# Allegro board PCB.brd
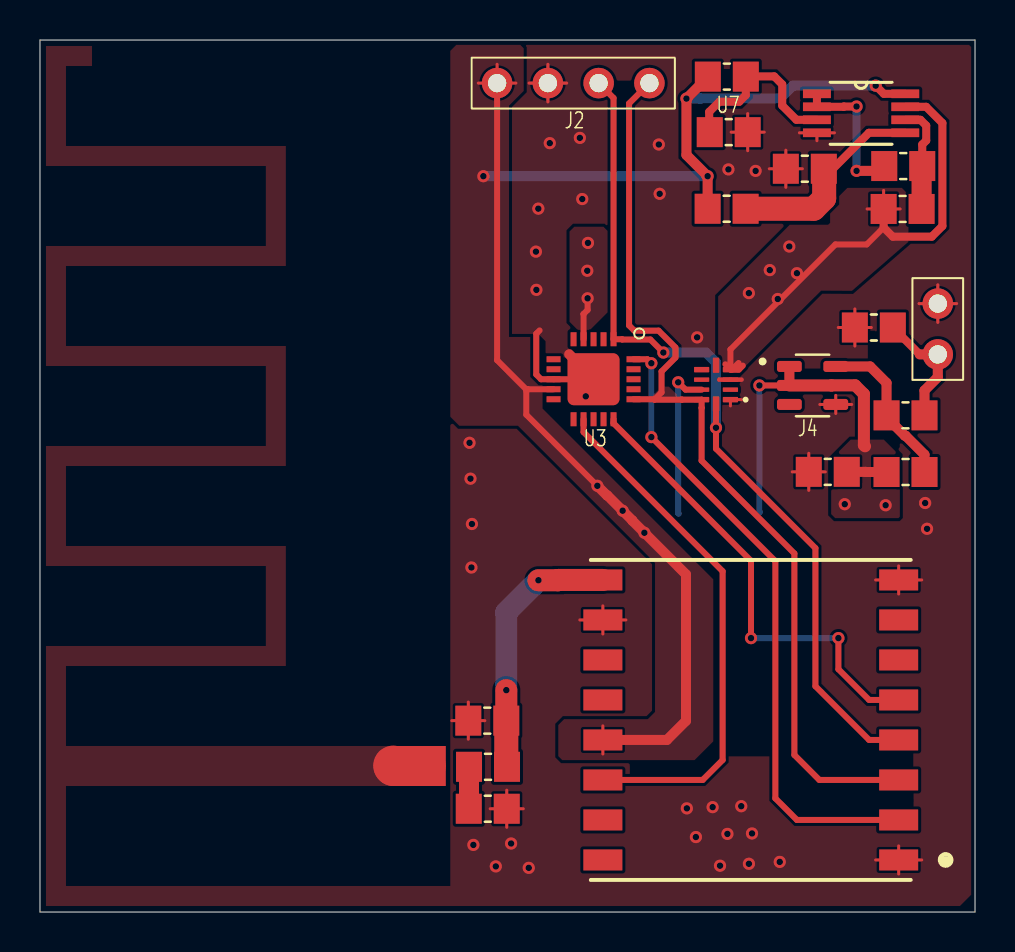
[diagram p0: board, top side]
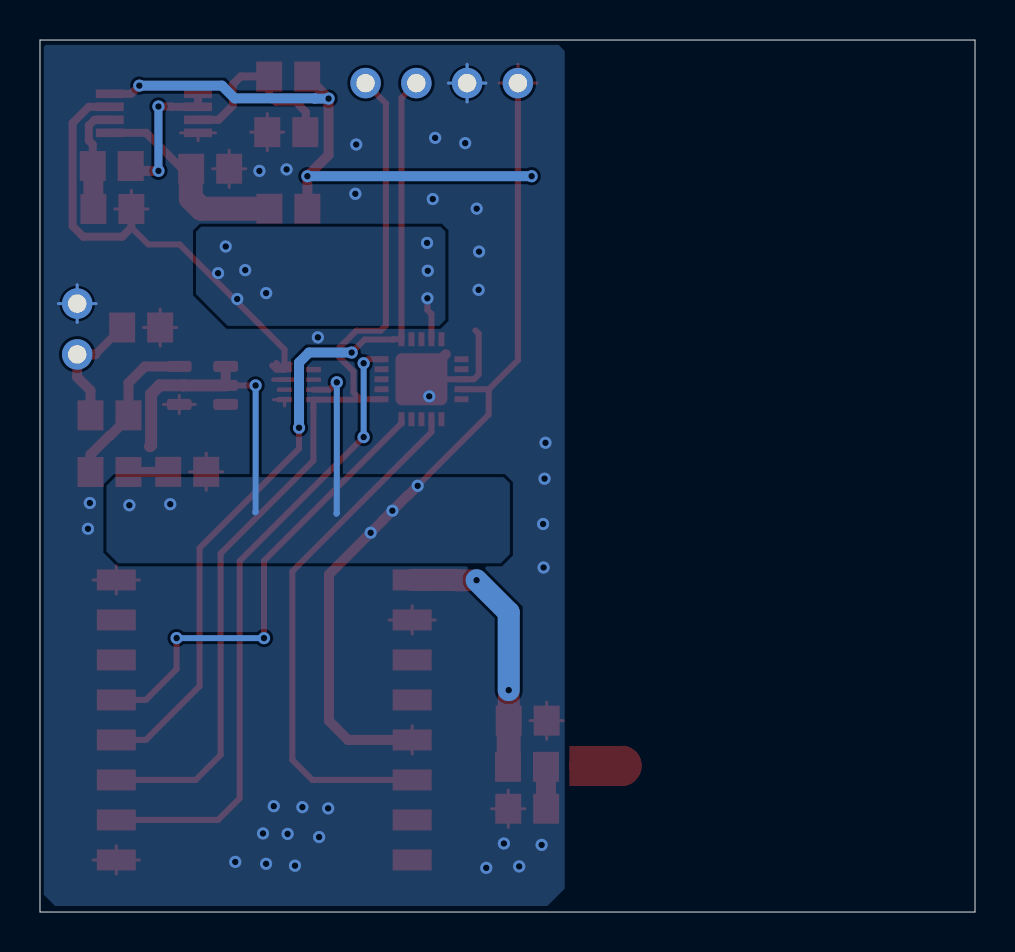
[diagram p1: board, bottom side, seen from below]

Outline 46.78 x 43.6 mm; copper layers: TOP, BOTTOM. Coordinates in mm from the lower left corner of the outline.
Outline path: 0,43.6 0,0 46.78,0 46.78,43.6 0,43.6

## Design rules (mm)
constraint set DEFAULT: min track width 0.15

## Placement (name value [footprint] x y rotation side)
C1  34.8p  [CAPC2012X135N]  22.38 9.57 0 top
C2  52.2p  [CAPC2012X135N]  22.4 5.16 180 top
C3  10u  [CAPC2012X135N]  41.72 29.23 0 top
C4  68u  [CAPC2012X135N]  39.41 22.01 0 top
D1  1N5511  [CAPC2012X135N]  43.3 22 180 top
J1  RFM95  [XCVR_RFM95W-868S2]  35.56 9.6 180 top
J2  SI7021  [JUMPER4]  22.87 41.45 0 top
J3  ADS1014  [QFN50P200X150X40-10N]  33.82 26.37 180 top
J4  NCP1402  [SOT95P275X110-5N]  38.65 26.33 0 top
J5  LTC2064  [MSOP-8_MS]  41.08 39.94 0 top
J6  CON2  [JUMPER2]  44.92 27.88 90 top
J7  ant  [PORT_ANTENA]  19.3 7.3 0 top
L2  10uH  [CAPC2012X135N]  43.3 24.83 0 top
L3  1.40n  [CAPC2012X135N]  22.41 7.26 180 top
R6  10k  [CAPC2012X135N]  34.46 38.99 180 top
R7  195.23k  [CAPC2012X135N]  34.35 35.16 180 top
R8  200k  [CAPC2012X135N]  38.27 37.16 0 top
R9  10k  [CAPC2012X135N]  43.19 37.3 180 top
R10  120k  [CAPC2012X135N]  43.16 35.15 0 top
U3  ATTINY84  [QFN20G-05-4X4MM]  27.7 26.64 270 top
U7  TFPT1206L1002  [CAPC2012X135N]  34.36 41.77 0 top

## Library data of the parts
C1-C4 = C
D1 = 1N4376
J1 = CON16
J2 = CON4
J3 = CON10
J4 = CON5
J5 = CON8
J6 = CON2
J7 = CON1
L2 L3 = L
R6-R10 = R
U3 = MC-8B-ATTINY24-SQ21_0
U7 = TFPT1206L1002

## Footprints (pads in the part's own frame, mm; a bottom-side part is the same pattern mirrored in y, then rotated)
CAPC2012X135N
  rect 1.3x1.5 smd: 1(-0.95,0) 2(0.95,0)
JUMPER2
  round 1.524 hole 0.914: 1(0,0) 2(2.54,0)
JUMPER4
  round 1.524 hole 0.914: 1(0,0) 2(2.54,0) 3(5.08,0) 4(7.62,0)
MSOP-8_MS
  rect 1.397x0.432 smd: 1(-2.21,0.975) 2(-2.21,0.325) 3(-2.21,-0.325) 4(-2.21,-0.975) 5(2.21,-0.975) 6(2.21,-0.325) 7(2.21,0.325) 8(2.21,0.975)
PORT_ANTENA
  rect 2x2 smd: 1(0,0)
QFN20G-05-4X4MM
  rect 0.7x0.3 smd: 1(-2,1) 2(-2,0.5) 3(-2,0) 4(-2,-0.5) 5(-2,-1) 11(2,-1) 12(2,-0.5) 13(2,0) 14(2,0.5) 15(2,1)
  rect 0.3x0.7 smd: 6(-1,-2) 7(-0.5,-2) 8(0,-2) 9(0.5,-2) 10(1,-2) 16(1,2) 17(0.5,2) 18(0,2) 19(-0.5,2) 20(-1,2)
  custom 2.6x2.6 smd: PAD(0,0)
QFN50P200X150X40-10N
  custom 0.76x0.27 smd: 1(-0.72,0.75) 4(-0.72,-0.75) 6(0.72,-0.75) 9(0.72,0.75)
  custom 0.76x0.22 smd: 2(-0.72,0.25) 3(-0.72,-0.25) 7(0.72,-0.25) 8(0.72,0.25)
  custom 0.32x0.76 smd: 5(0,-0.97) 10(0,0.97)
SOT95P275X110-5N
  custom 1.24x0.55 smd: 1(-1.16,0.95) 2(-1.16,0) 3(-1.16,-0.95) 4(1.16,-0.95) 5(1.16,0.95)
XCVR_RFM95W-868S2
  rect 1.95x1.05 smd: 1(-7.4,7) 2(-7.4,5) 3(-7.4,3) 4(-7.4,1) 5(-7.4,-1) 6(-7.4,-3) 7(-7.4,-5) 8(-7.4,-7) 9(7.4,-7) 10(7.4,-5) 11(7.4,-3) 12(7.4,-1) 13(7.4,1) 14(7.4,3) 15(7.4,5) 16(7.4,7)

## Nets
3V3: C4.2 D1.2(K) J1.13 J2.1 J3.8 J4.1 J4.2 J5.8 R7.2 U3.9(VCC) U7.1(RP)
VCC: C3.2 J6.1 L2.2
0: C1.1 C2.1 C3.1 C4.1 J1.1 J1.8 J1.10 J2.2 J3.1 J3.3 J4.4 J5.4 J6.2 J7.1 R6.1 R8.1 U3.8 U3.PAD
ANT_LORA: C1.2 J1.9 L3.1
DIO0: J1.14 U3.12
MISO: J1.2 U3.20
MOSI: J1.3 J2.4 J3.9 U3.16
NSS: J1.5 U3.15
SCK: J1.4 J2.3 J3.10 U3.1
VOUT_AMP: J3.4 J5.7 R10.1 U3.4
N16090: J5.1 J5.2 R9.2
N16108: J5.5 R7.1 R8.2
N16144: J5.3 R6.2 U7.2
N16168: J5.6 R9.1 R10.2
N16662: D1.1 J4.5 L2.1
N16822: C2.2 L3.2

Pads without a net: J1 6 7 11 12 15 16; J3 2 5 6 7; J4 3; U3 2 3 5 6 7 10 11 13 14 17 18 19

## Via types
v1: diameter 0.61, hole 0.33, TOP to BOTTOM, 60 vias

## Routing (per net, layer and track width the routed paths; a pad name or vN(x,y) marks a point on that pad's centre or on a via; arc(x,y) is an arc through that point)
3V3: length 101.7
  TOP w0.15: 28.16,7.9 J1.13 28.16,9.31 ; J2.1 22.87,42.38 ; J2.1 23.81,41.45 ; J2.1 21.93,41.45
  TOP w0.3: 24.4,26.12 24.34,26.12 22.87,27.59 J2.1 ; 24.4,26.12 24.33,26.05 24.33,24.86 v1(27.89,21.31) ; 24.4,26.12 24.41,26.14 U3.9 ; J4.2 v1(35.99,26.33) ; J3.8 32.3,26.12 v1(31.93,26.48)
  TOP w0.4: J5.8 42.22,40.91 v1(41.81,41.32)
  TOP w0.5: R7.2 v1(33.4,36.79) 32.34,37.85 v1(32.34,40.67) 33.41,41.74 U7.1 ; C4.2 41.31,22.01 41.32,22 D1.2 ; v1(27.89,21.31) 28.37,20.83 28.39,20.83 v1(29.15,20.07) 29.63,19.58 29.63,19.57 v1(30.24,18.96) 32.32,16.88 32.32,9.56 31.37,8.6 J1.13 27.86,8.6 ; J4.1 J4.2
  TOP w0.6: 41.28,23.29 41.22,23.34 41.22,25.9 40.78,26.33 39.6,26.33 39.6,26.33 J4.2
  BOTTOM w0.3: v1(31.93,26.48) 31.93,19.94 31.96,19.91 ; 42.25,20.41 42.25,20.39 v1(42.31,20.34) ; 36.01,19.98 35.99,20 v1(35.99,26.33)
  BOTTOM w0.5: v1(32.34,40.67) 33.02,40.67 33.03,40.68 37.04,40.68 37.67,41.32 v1(41.81,41.32) ; v1(33.4,36.79) v1(22.18,36.79)
  vias: v1(40.26,20.39)
VCC: length 6.1
  TOP w0.4: C3.2 44.01,27.88
  TOP w0.5: L2.2 44.25,26.08 44.92,26.74 J6.1 44.01,27.88
0: length 62.5
  TOP w0.15: J1.1 44.11,2.6 ; J1.1 42.96,1.9 ; J1.1 41.81,2.6 ; J1.1 42.96,3.31 ; J6.2 44.92,31.36 ; J6.2 45.86,30.42 ; J6.2 43.98,30.42 ; J6.2 44.92,29.48 ; R6.1 35.41,39.92 ; R6.1 36.24,38.99 ; R6.1 34.58,38.99 ; R6.1 35.41,38.06 ; J1.10 29.31,14.6 ; J1.10 28.16,15.31 ; J1.10 27.01,14.6 ; J1.10 28.16,13.9 ; J1.8 42.96,17.31 ; J1.8 41.81,16.6 ; J1.8 44.11,16.6 ; J1.8 42.96,15.9 ; 37.63,22.01 C4.1 ; C4.1 39.29,22.01 ; C4.1 38.46,22.94 ; C4.1 38.46,21.08 ; R8.1 38.14,37.16 ; R8.1 37.31,38.09 ; R8.1 36.49,37.16 ; R8.1 37.31,36.23 ; 37.99,38.96 J5.4 ; J5.4 39.75,38.96 ; J5.4 38.87,38.57 ; 35.1,25.62 J3.1 34.54,25.3 ; 39.81,24.92 J4.4 ; J4.4 39.81,25.83 ; J4.4 40.61,25.38 ; J4.4 39.01,25.38 ; C3.1 40.77,30.15 ; C3.1 39.94,29.23 ; C3.1 41.6,29.23 ; C3.1 40.77,28.3 ; J2.2 25.41,42.38 ; J2.2 24.47,41.45 ; J2.2 25.41,40.51 ; J2.2 26.35,41.45 ; C2.1 23.35,6.09 ; C2.1 23.35,4.23 ; C2.1 22.52,5.16 ; C2.1 24.18,5.16 ; C1.1 22.26,9.57 ; C1.1 21.43,8.64 ; C1.1 21.43,10.5 ; C1.1 20.6,9.57
  TOP w0.225: 33.98,26.62 J3.3 35.1,26.62
  TOP w0.3: U3.PAD U3.8 25.07,26.64 24.83,26.88 24.83,28.91 25,29.08
  TOP w0.5: 26.48,27.89 27.7,26.67 U3.PAD
  TOP w2: 17.67,7.32 17.69,7.3 J7.1
  BOTTOM w0.15: J6.2 44.92,31.36 ; J6.2 44.92,29.48 ; J6.2 45.86,30.42 ; J6.2 43.98,30.42 ; 25.41,40.51 J2.2 ; J2.2 25.41,42.38 ; J2.2 24.47,41.45 ; J2.2 26.35,41.45
  vias: v1(21.49,23.46) v1(21.54,21.67) v1(21.61,19.4) v1(21.59,17.23) v1(21.68,3.35) v1(22.8,2.28) v1(23.57,3.42) v1(24.45,2.21) v1(24.81,33.02) v1(24.84,31.11) v1(24.93,35.17) v1(25.5,38.44) v1(27.01,38.7) v1(27.13,35.65) v1(27.3,25.78) v1(30.96,38.38) v1(31,35.91) v1(32.36,5.18) v1(32.81,3.75) v1(32.88,28.73) v1(33.65,5.24) v1(34.02,2.31) v1(34.44,37.13) v1(34.39,3.9) v1(35.08,5.29) v1(35.47,2.41) v1(35.62,3.93) v1(35.8,37.05) v1(37.01,2.5) v1(44.28,20.45) v1(44.38,19.16)
ANT_LORA: length 13.2
  TOP w1.1: J1.9 25.93,16.6 25.92,16.59 v1(24.94,16.59) ; v1(23.33,11.09) C1.2
  TOP w1.2: L3.1 23.33,7.29 C1.2
  BOTTOM w1.1: v1(23.33,11.09) 23.33,14.98 v1(24.94,16.59)
DIO0: length 26.6
  TOP w0.3: 27.86,6.6 J1.14 33.15,6.6 34.15,7.6 34.15,17.04 27.2,24 U3.12
MISO: length 32.2
  TOP w0.3: 43.26,4.6 J1.2 37.87,4.6 36.79,5.68 36.79,17.54 v1(30.59,23.75) ; U3.20 30.39,27.64 v1(30.59,27.44)
  BOTTOM w0.3: v1(30.59,27.44) v1(30.59,23.75)
MOSI: length 47.5
  TOP w0.3: U3.16 30.73,25.64 30.74,25.62 ; J2.4 29.47,40.43 29.47,29.33 29.73,29.07 30.95,29.07 31.79,28.22 31.79,27.72 31.1,27.03 31.1,25.98 30.74,25.62 ; 32.12,25.62 J3.9 33.1,25.21 33.1,25.2 33.1,22.57 37.74,17.93 37.74,7.85 38.99,6.6 J1.3 43.26,6.6 ; 32.12,25.62 32.11,25.62 ; 32.12,25.62 30.75,25.62 30.74,25.62
NSS: length 23.7
  TOP w0.3: U3.15 28.7,24.44 35.57,17.56 v1(35.57,13.7) ; 43.26,10.6 J1.5 41.48,10.6 39.95,12.14 v1(39.95,13.7)
  BOTTOM w0.3: v1(39.95,13.7) v1(35.57,13.7)
SCK: length 43.7
  TOP w0.3: J2.3 28.7,40.7 U3.1 29.12,28.64 29.13,28.62 30.54,28.62 v1(31.19,27.97) ; J3.10 33.82,24.74 33.82,24.74 v1(33.82,24.21) 33.82,23.17 38.79,18.19 38.79,11.29 41.48,8.6 J1.4 43.26,8.6
  BOTTOM w0.5: v1(31.19,27.97) 33.32,27.97 33.82,27.47 v1(33.82,24.21)
VOUT_AMP: length 29.1
  TOP w0.15: R10.1 43.04,35.15 ; R10.1 41.38,35.15 ; R10.1 42.21,36.08
  TOP w0.3: 34.62,27.12 J3.4 34.54,27.14 ; 34.62,27.12 34.96,27.12 35.16,27.32 ; 34.62,27.12 34.95,27.45 ; v1(27.4,30.68) 27.4,30.1 27.19,29.9 27.2,29.9 U3.4 ; 34.54,27.14 34.29,27.39 ; 34.54,27.14 34.54,28.13 39.79,33.38 41.36,33.38 42.21,34.23
  TOP w0.4: J5.7 44.33,40.26 45.15,39.45 45.15,34.3 44.61,33.77 42.67,33.77 42.21,34.23 R10.1
  vias: v1(27.41,33.45) v1(27.38,32.06) v1(35.46,30.95) v1(36.51,32.09) v1(36.91,30.65) v1(37.49,33.27) v1(37.87,31.94)
N16090: length 7.3
  TOP w0.4: v1(40.85,40.27) 40.22,40.27 40.21,40.26 J5.2 J5.1
  TOP w0.5: v1(40.85,37.06) 42,37.06 R9.2
  BOTTOM w0.4: v1(40.85,37.06) v1(40.85,40.27)
N16108: length 10.5
  TOP w0.4: R8.2 39.67,37.16 41.47,38.96 J5.5
  TOP w1.2: R8.2 39.23,37.15 39.23,35.69 38.71,35.16 R7.1
N16144: length 9.2
  TOP w0.4: J5.3 37.84,39.61 37.13,40.32 37.13,41.38 36.73,41.78 35.32,41.78 U7.2 35.31,40.84 34.98,40.51 33.99,40.51 33.48,40.01 33.48,39.02 R6.2
N16168: length 5.4
  TOP w0.4: J5.6 44.05,39.61 44.34,39.32 44.34,38.57 44.14,38.37 R9.1
  TOP w1: R10.2 44.11,37.27 R9.1
N16662: length 8.1
  TOP w0.5: D1.1 44.25,22.87 43.3,23.82 43.27,23.82 42.35,24.73 L2.1 42.35,26.45 41.53,27.28 J4.5
N16822: length 2.1
  TOP w1: C2.2 21.46,5.17 L3.2

## Copper pours and planes (outline as drawn; the poured copper is in the pictures)
3V3 on TOP: 39.58,21.44 39.58,19.89 39.78,19.69 42.95,19.69 43.02,19.76 43.02,21.22 42.78,21.45 39.6,21.45
3V3 on TOP: 30.41,9.64 26.22,9.64 25.93,9.35 25.93,7.79 26.13,7.59 32.74,7.59 33.68,8.53 33.68,16.63 25.14,25.17 25.14,28.48 24.87,28.75 23.46,28.75 23.46,40.31 24.2,41.05 24.2,43.18 24.03,43.36 20.83,43.36 20.53,43.05 20.53,24.76 20.98,24.31 23.91,24.31 30.77,17.45 30.77,10.01
3V3 on TOP: 42.22,23.62 40.56,23.62 39.58,22.64 39.58,21.36 39.98,20.96 42.78,20.96 43,21.19 43,22.83
3V3 on BOTTOM: 43.02,21.75 23.59,21.75 23.27,21.43 23.27,17.89 23.73,17.43 42.86,17.43 43.46,18.03 43.46,21.31
0 on TOP: 20.53,43.05 20.83,43.36 46.48,43.36 46.59,43.25 46.59,0.86 46.02,0.3 21.39,0.3 20.53,1.17 ; 15 cut-outs
0 on TOP: 0.3,0.3 20.3,0.3 20.3,1.3 1.3,1.3 1.3,6.3 20.3,6.3 20.3,8.3 1.3,8.3 1.3,12.3 12.3,12.3 12.3,18.3 1.3,18.3 1.3,22.3 12.3,22.3 12.3,28.3 1.3,28.3 1.3,32.3 12.3,32.3 12.3,38.3 1.3,38.3 1.3,42.3 17.3,42.3 17.3,43.3 0.3,43.3 0.3,37.3 11.3,37.3 11.3,33.3 0.3,33.3 0.3,27.3 11.3,27.3 11.3,23.3 0.3,23.3 0.3,17.3 11.3,17.3 11.3,13.3 0.3,13.3 ; 1 cut-out
0 on TOP: 19.96,1.29 19.96,0.3 19.96,0.3 21.68,0.3 21.86,0.48 21.86,1.26 21.83,1.3 19.96,1.3
0 on BOTTOM: 20.53,1.17 21.39,0.3 46.02,0.3 46.59,0.86 46.59,43.25 46.48,43.36 20.83,43.36 20.53,43.05
VOUT_AMP on TOP: 28.19,34.26 26.73,34.26 26.49,34.02 26.49,29.51 26.93,29.08 26.93,27.91 27.01,27.83 27.41,27.83 27.48,27.91 27.48,29.07 28.43,30.01 28.43,34.02
VOUT_AMP on TOP: 33.93,30.78 33.93,27.89 34.14,27.68 34.14,27.47 34.3,27.3 35.32,27.31 39.08,31.07 40.62,31.05 43.45,33.51 43.45,35.87 43.11,36.2 40.39,36.2 39.53,35.34 39.53,34.46 39.43,34.36 37.51,34.36
VOUT_AMP on BOTTOM: 26.5,34.02 26.5,29.61 26.8,29.31 37.39,29.31 38.97,30.89 38.97,34.01 38.72,34.26 26.73,34.26

Small or netless copper shapes (teardrops, artwork), in the pictures only: 1 on TOP
